# Altium PCB alpha_2.1.PcbDoc (part 2 of 2)
Units mil, origin at the board's own origin, x right, y up, seen from the top; angles counter-clockwise.
Board outline 3200 x 2100 mil, 6 copper layers (Component Side, Ground Plane (GND), Inner Layer 1, Inner Layer 2, Power Plane (VCC), Solder Side), stack 51.068 mil thick; 181 components, 149 nets, 637 pads, 303 vias.
Unrouted connection lines stored in the file: 8.
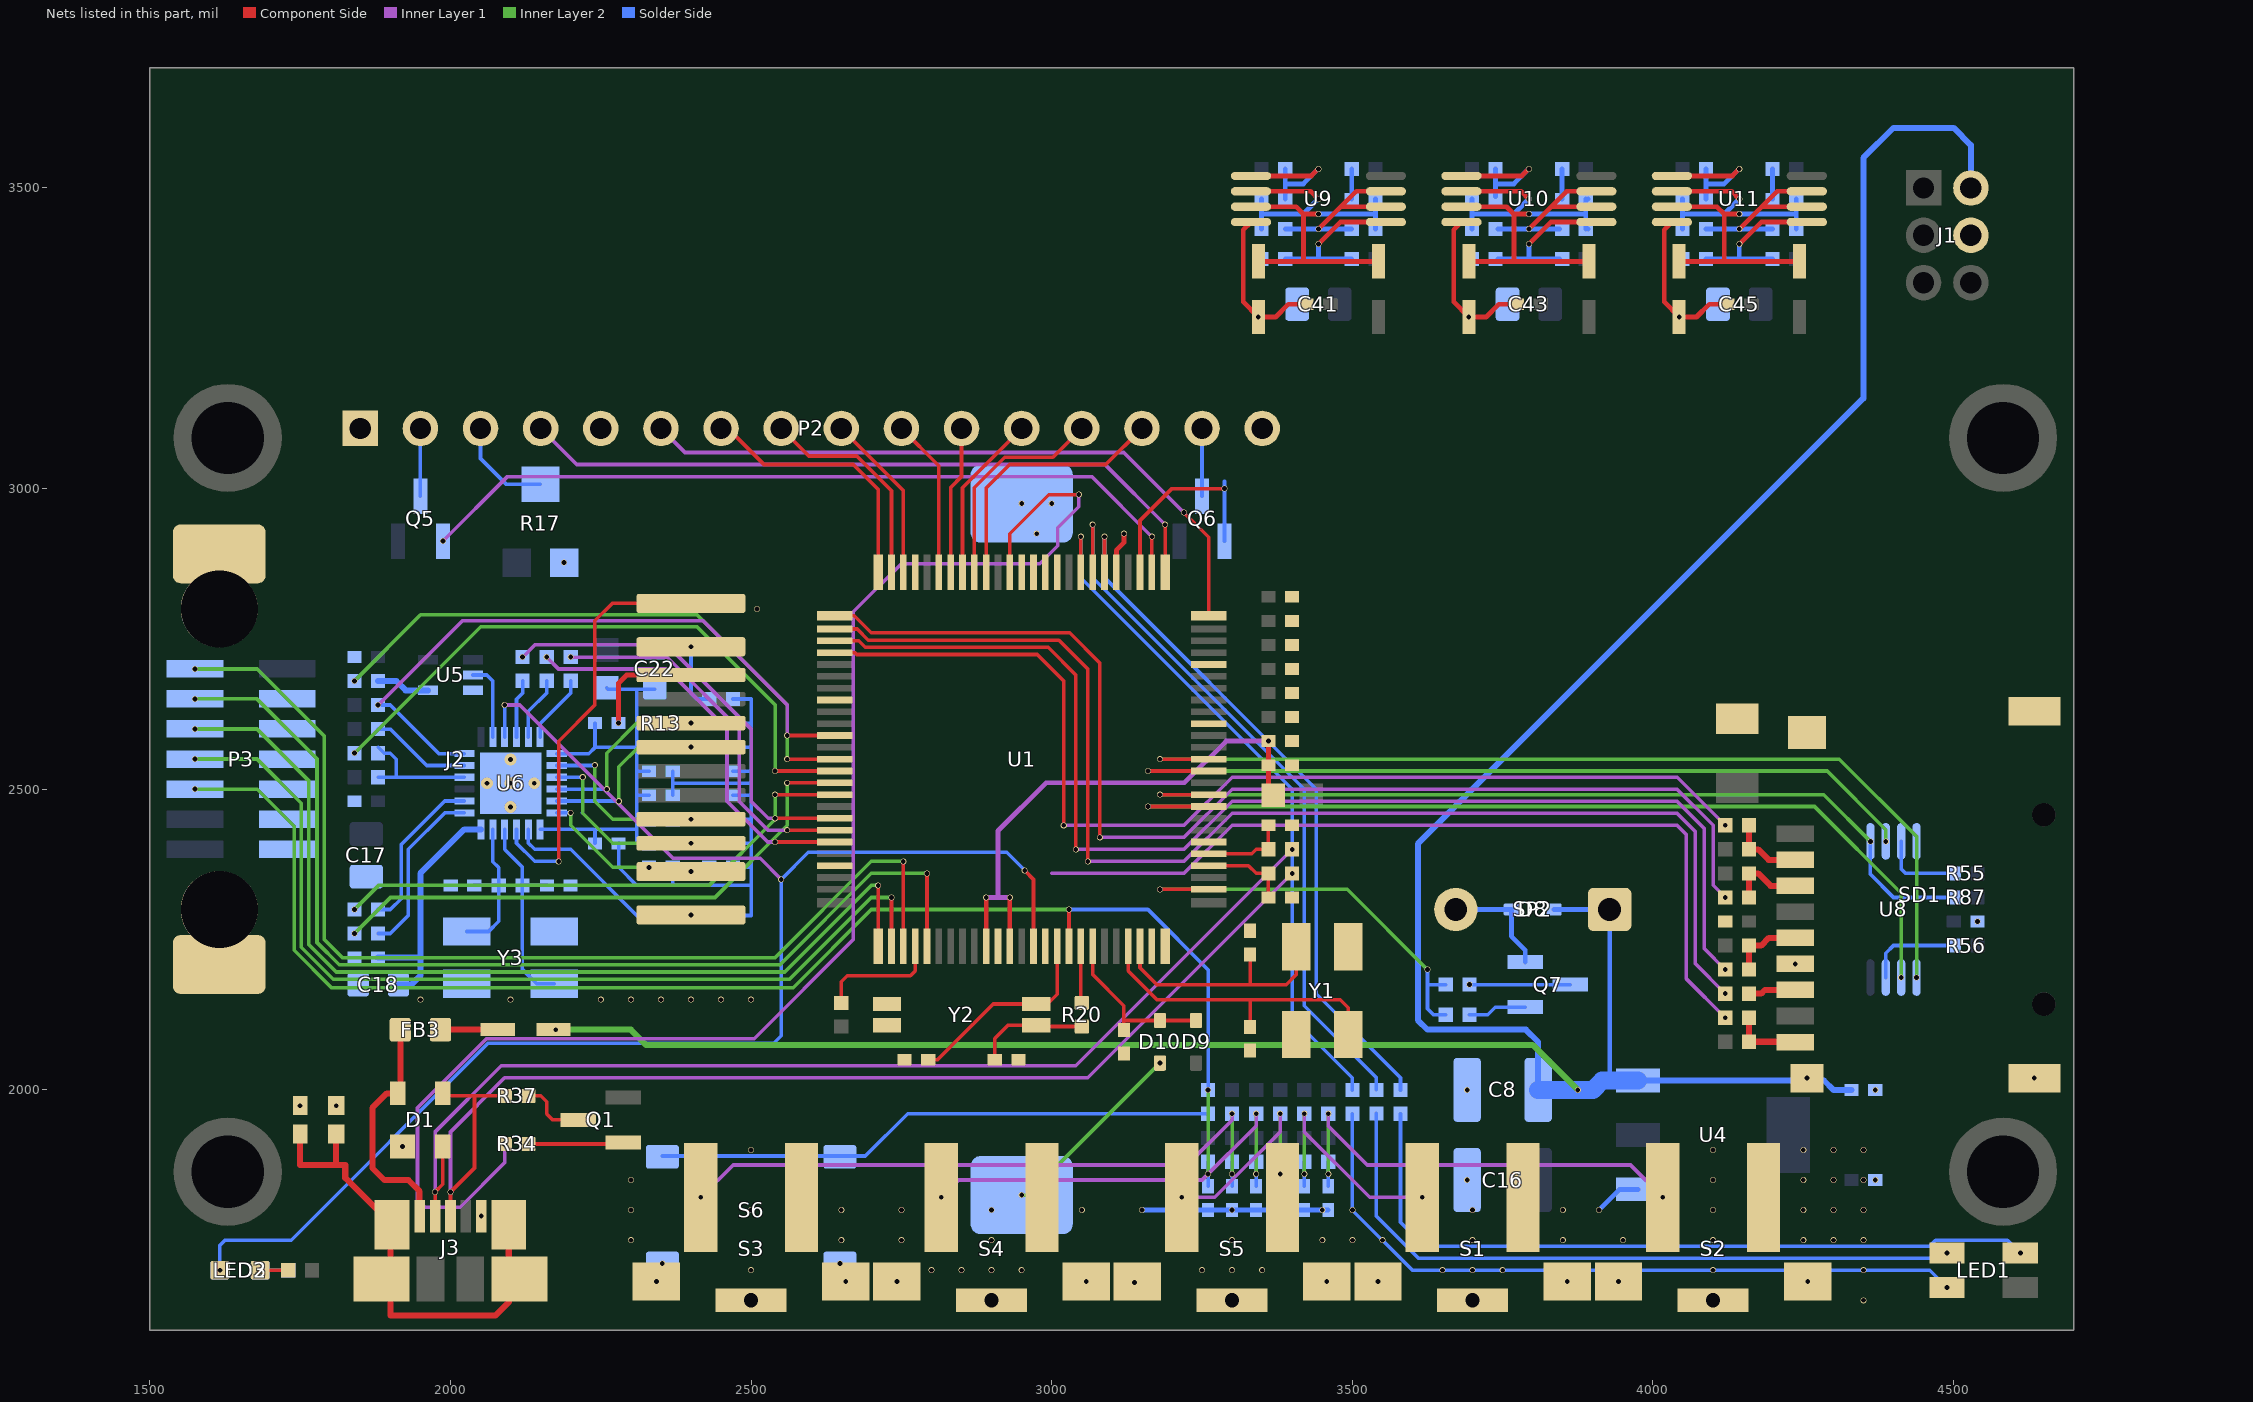
[diagram p6: the nets of this part, all layers, seen from the top]

## Via types
v1: diameter 10, hole 8, Component Side to Inner Layer 1, 119 vias
v2: diameter 10, hole 8, Component Side to Solder Side, 117 vias
v3: diameter 10, hole 8, Inner Layer 2 to Solder Side, 62 vias
v4: diameter 19.68, hole 7.87, Component Side to Solder Side, 5 vias

## Nets (pads, with @x,y where several pads share a name; then routed paths per layer and width w, separated by ;. In a path a pad name is that pad's centre, name@x,y a point inside that pad or via, vN(x,y) a via of type N, cw(c..) or ccw(c..) an arc to the next point about the centre after c; other vN are vias at no path point) (continued)
ENET-MDIO: R6.2 U1.86 U6.12 | length 1102.9
  Component Side w6: v1(2560,2589.37) U1.86@2638.98,2589.37
  Inner Layer 1 w6: v2(1879.69,2640) 1880,2640 2020,2780 2420,2780 2560,2640 v1(2560,2589.37)
  Solder Side w6: v2(1879.69,2640) 1900,2640 1980.79,2559.21 U6.12@2023.23,2559.21
ENET-REF_CLK: R5.1 U1.88 | length 996.4
  Component Side w6: v2(2560,2550) U1.88@2638.98,2550
  Inner Layer 2 w6: v3(1840.32,2680) 1950.32,2790 2410,2790 2560,2640 v2(2560,2550)
ENET-RX_ER: R4.1 U1.89 | length 1049.2
  Component Side w6: v2(2540,2530.32) U1.89@2638.98,2530.32
  Inner Layer 2 w6: v3(1840.32,2560) 2050.32,2770 2410,2770 2540,2640 v2(2540,2530.32)
ENET-RXD0: R1.1 U1.91 | length 901.7
  Component Side w6: v2(2540,2490.94) U1.91@2638.98,2490.94
  Inner Layer 2 w6: v3(1840.32,2300) 1880.32,2340 2430,2340 2540,2450 v2(2540,2490.94)
ENET-RXD1: R2.1 U1.90 | length 943.8
  Component Side w6: v2(2560,2510.63) U1.90@2638.98,2510.63
  Inner Layer 2 w6: v3(1840.32,2260) 1900.32,2320 2440,2320 2560,2440 v2(2560,2510.63)
ENET-TX_EN: R92.1 U1.93 | length 717.2
  Component Side w6: v1(2540,2451.57) U1.93@2638.98,2451.57
  Inner Layer 1 w6: v2(2120,2719.68) 2140.32,2740 2360,2740 2500,2600 2500,2480 2528.43,2451.57 v1(2540,2451.57)
ENET-TXD0: R90.1 U1.95 | length 676.6
  Component Side w6: v1(2540,2412.2) U1.95@2638.98,2412.2
  Inner Layer 1 w6: v2(2160,2719.68) 2179.68,2700 2360,2700 2460,2600 2460,2480 2527.8,2412.2 v1(2540,2412.2)
ENET-TXD1: R91.1 U1.94 | length 628.5
  Component Side w6: v1(2560,2431.89) U1.94@2638.98,2431.89
  Inner Layer 1 w6: v2(2200,2719.68) 2360.32,2719.68 2480,2600 2480,2480 2528.11,2431.89 v1(2560,2431.89)
GND: BT1.2 C1.2 C2.2 C3.1 C4.2 C5.1 C6.1 C7.1 C8.2 C9.1 C10.2 C11.2 C12.2 C13.1 C14.2 C15.1 C16.2 C17.2 C18.2 C19.2 C20.2 C21.1 C22.2 C23.1 C24.1 C25.1 C26.1 C27.1 C28.2 C29.2 C30.2 C31.2 C32.2 C33.2 C34.2 C35.2 C36.2 C37.2 C38.2 C41.2 C43.2 C45.2 C64.2 C65.2 C66.2 C67.1 C68.1 C69.1 C70.1 C71.1 C72.1 C73.2 C74.2 C75.2 D1.1 D3.1 D5.1 D7.1 J1.5 J2.10 J2.MH1 J2.MH2 J3.5 LED2.K P2.1 P2.5 P2.16 P3.3 P3.5 P3.7 P3.9 P3.11 P3.13 Q7.3 R9.1 R14.2 R15.1 R16.1 R17.1 R30.1 R65.1 R72.1 R79.1 R85.1 S1.2 S1.3 S2.2 S2.3 S3.2 S3.3 S4.2 S4.3 S5.2 S5.3 S6.1 SD1.6 SD1.10 SD1.11 SD1.12 SD1.13 U1.11 U1.15 U1.31 U1.41 U1.55 U1.72 U1.83 U1.97 U4.1 U5.3 U6.25 U8.4 U9.4 U10.4 U11.4 Y1.2 Y1.4 Y2.2 Y2.3 Y3.2 Y3.4 | length 2712.1
  Component Side w8: v2(2279.69,2610) 2279.69,2676.69 2293,2690 J2.10@2400,2690 ; U1.55@3107.48,2861.02 3107.48,2897.48 3120,2910 v1(3120,2925) ; U9.4@3331.4,3443.29 3318.61,3430.49 3318.61,3310.41 v2(3343.61,3285.41) 3372.35,3285.41 3393.61,3306.67 C36.2@3423.92,3306.67 ; U10.4@3681.4,3443.29 3668.61,3430.49 3668.61,3310.41 v2(3693.61,3285.41) 3722.35,3285.41 3743.61,3306.67 C37.2@3773.92,3306.67 ; U11.4@4031.4,3443.29 4018.61,3430.49 4018.61,3310.41 v2(4043.61,3285.41) 4072.35,3285.41 4093.61,3306.67 C38.2@4123.92,3306.67
  Solder Side w6: C4.2@2279.69,2410 2279.69,2370.31 2310,2340 2500,2340 ; 2369.68,2340 R9.1@2369.68,2370 ; C21.1@2369.68,2490 C27.1@2369.68,2530 ; 2370,2510 2500,2510 ; R14.2@2469.69,2290 2500,2290 2500,2340 ; R16.1@2469.68,2370 2500,2370 ; C23.1@2469.68,2410 2500,2410 ; C24.1@2469.68,2450 2500,2450 ; C28.2@2469.69,2490 2500,2490 ; C29.2@2469.69,2530 2500,2530 ; C25.1@2469.68,2570 2500,2570 ; C26.1@2469.68,2610 2500,2610 ; R15.1@2469.68,2650 2500,2650 2500,2510 ; v1(3694.68,2175) Q7.3@3862.4,2175 ; 2500,2340 2500,2370 ; 2500,2370 2500,2510
  Solder Side w8: v1(3150,1800) 3150.31,1800.31 C14.2@3260,1800.31 C33.2@3300,1800.31 C31.2@3340,1800.31 C30.2@3380,1800.31 C35.2@3420,1800.31 C34.2@3460,1800.31 ; v2(3910,1800) 3944.45,1834.45 U4.1@3975,1834.45
  other v1: 4350,1650 3137.52,1679.68 2342.52,1681.5 2657.48,1681.5 2742.52,1681.5 3057.48,1681.5 3457.48,1681.5 3542.52,1681.5 4257.48,1681.5 1616.54,1700 2500,1700 2800,1700 2850,1700 2900,1700 2950,1700 3250,1700 3300,1700 3350,1700 3650,1700 3700,1700 3750,1700 4100,1700 4350,1700 2300,1750 2650,1750 2750,1750 2900,1750 3300,1750 3450,1750 3500,1750 3550,1750 3700,1750 3850,1750 3950,1750 4100,1750 4250,1750 4300,1750 4350,1750 2051.13,1790 2300,1800 2500,1800 2650,1800 2750,1800 2900,1800 3050,1800 3300,1800 3450,1800 3500,1800 3700,1800 3850,1800 4100,1800 4250,1800 4300,1800 4350,1800 2300,1850 4100,1850 4250,1850 4300,1850 4350,1850 4369.69,1850 2500,1900 4100,1900 4250,1900 4300,1900 4350,1900 1920.47,1905.71 1750,1973.62 1810,1973.62 3690.94,2000 4369.69,2000 4256.3,2019.49 4634.25,2019.49 1950,2150 2100,2150 4236.61,2209.45 4539.69,2280
  other v2: 3857.48,1681.5 3942.52,1681.5 2352.36,1711.42 2647.64,1711.42 3690.94,1850 2250,2150 2300,2150 2350,2150 2400,2150 2450,2150 2500,2150 2510,2800 2189,2877 2975,2925 2950,2975 3000,2975
  other v4: 2100,2470.63 2060.63,2510 2100,2510 2139.37,2510 2100,2549.37
I2C_SCL: U1.24
I2C_SDA: U1.25
JTAG_RESET: C14.1 P3.10 R22.1 R23.1 U1.17 | length 2479.5
  Component Side w6: U1.17@3028.74,2238.98 v2(3028.74,2300)
  Inner Layer 2 w6: v3@1575,2500 1678.54,2500 1740,2438.54 1740,2232.12 1802.12,2170 2570,2170 2700,2300 v2(3028.74,2300) ; v3(3260,1860) v3(3260,1999.68)
  Solder Side w6: v2(3028.74,2300) 3160,2300 3260,2200 v3(3260,1999.68) ; C14.1@3260,1839.68 v3(3260,1860) R23.1@3260,1880.32
  other v3: 1575,2500.2
JTAG_TCLK_SWCLK: P3.4 U1.5 | length 1763.6
  Component Side w6: U1.5@2792.52,2238.98 v2(2792.52,2360)
  Inner Layer 2 w6: v3(1575,2650.2) 1678.35,2650.2 1778,2550.54 1778,2245.03 1815.03,2208 2548,2208 2700,2360 v2(2792.52,2360)
JTAG_TDI: P3.8 U1.2 | length 1587.8
  Component Side w6: U1.2@2733.46,2238.98 v2(2733.46,2320)
  Inner Layer 2 w6: v3(1575,2550.2) 1678.35,2550.2 1752,2476.54 1752,2237.09 1805.09,2184 2564,2184 2700,2320 v2(2733.46,2320)
JTAG_TDO_SWO: P3.6 U1.1 | length 1624.1
  Component Side w6: U1.1@2711.42,2238.98 v2(2711.42,2340)
  Inner Layer 2 w6: v3(1575,2600.2) 1678.35,2600.2 1764,2514.54 1764,2242.06 1810.06,2196 2556,2196 2700,2340 v2(2711.42,2340)
JTAG_TMS_SWDIO: P3.2 U1.3 | length 1782.6
  Component Side w6: U1.3@2753.15,2238.98 v2(2753.15,2380)
  Inner Layer 2 w6: v3@1575,2700 1678.54,2700 1790,2588.54 1790,2250 1820,2220 2540,2220 2700,2380 v2(2753.15,2380)
  other v3: 1575,2700.2
JTAG_TRST: R100.2 U1.4 | length 206.7
  Component Side w6: R100.2@2650,2144.69 2650,2180 2660,2190 2765,2190 2772.83,2197.83 U1.4@2772.83,2238.98
LCD_BL: Q6.1 U1.53 | length 348.2
  Component Side w6: U1.53@3146.85,2861.02 3146.85,2946.85 3200,3000 v2(3287.4,3000)
  Solder Side w6: Q6.1@3287.4,2912.6 v2(3287.4,3000) 3287.4,3012.4
LCD_D0: P2.7 U1.75 | length 441
  Component Side w6: P2.7@2450,3100 2461.47,3100 2521.47,3040 2670,3040 2711.42,2998.58 U1.75@2711.42,2861.02
LCD_D1: P2.8 U1.74 | length 361.8
  Component Side w6: P2.8@2550,3100 2595.87,3054.13 2675.87,3054.13 2733.46,2996.54 U1.74@2733.46,2861.02
LCD_D2: P2.9 U1.73 | length 281.7
  Component Side w6: P2.9@2650,3100 2753.15,2996.85 U1.73@2753.15,2861.02
LCD_D3: P2.10 U1.70 | length 264.7
  Component Side w6: P2.10@2750,3100 2812.2,3037.8 U1.70@2812.2,2861.02
LCD_D4: P2.11 U1.69 | length 246.5
  Component Side w6: U1.69@2831.89,2861.02 2831.89,3001.89 2850,3020 P2.11@2850,3100
LCD_D5: P2.12 U1.68 | length 279.7
  Component Side w6: U1.68@2851.57,2861.02 2851.57,3001.57 P2.12@2950,3100
LCD_D6: P2.13 U1.67 | length 359.9
  Component Side w6: U1.67@2871.26,2861.02 2871.26,3001.26 2922,3052 3002,3052 P2.13@3050,3100
LCD_D7: P2.14 U1.66 | length 440
  Component Side w6: U1.66@2890.94,2861.02 2890.94,3000.94 2930,3040 3090,3040 P2.14@3150,3100
LCD_EN: P2.6 U1.50 | length 1116.4
  Component Side w6: v1(3220,2960) 3261.02,2918.98 U1.50@3261.02,2788.58
  Inner Layer 1 w6: P2.6@2350,3100 2390,3060 3120,3060 v1(3220,2960)
LCD_PW: Q5.1 U1.52 | length 1324
  Component Side w6: U1.52@3166.54,2861.02 v1(3166.54,2920)
  Inner Layer 1 w6: v2(1987.4,2912.6) 2094.8,3020 3066.54,3020 v1(3166.54,2920)
LCD_RS: P2.4 U1.51 | length 1183.8
  Component Side w6: U1.51@3188.58,2861.02 v1(3188.58,2940)
  Inner Layer 1 w6: P2.4@2150,3100 2210,3040 3088.58,3040 v1(3188.58,2940)
LED_B: R43.2 U1.57 | length 1214.4
  Component Side w6: U1.57@3068.11,2861.02 v2(3068.11,2940)
  Solder Side w6: v2(3068.11,2940) 3068.11,2851.89 3420,2500 3420,2140 3540,2020 R43.2@3540,2000
LED_G: R41.2 U1.58 | length 1166.3
  Component Side w6: U1.58@3048.43,2861.02 v2(3048.43,2920)
  Solder Side w6: v2(3048.43,2920) 3048.43,2851.57 3400,2500 3400,2120 3500,2020 R41.2@3500,1999.69
LED_R: R39.1 U1.56 | length 1183.2
  Component Side w6: U1.56@3087.8,2861.02 v2(3087.8,2920)
  Solder Side w6: v2(3087.8,2920) 3087.8,2852.2 3440,2500 3440,2160 3580,2020 R39.1@3580,1999.68
NetC2_1: C2.1 C4.1 C21.2 C22.1 C27.2 FB2.1 R10.1 R11.1 R12.1 R13.1 U6.1 U6.19 | length 821.1
  Solder Side w6: U6.1@2149.21,2433.23 2310,2433.23 ; U6.19@2176.77,2559.21 2230,2559.21 2240.32,2569.53 ; C4.1@2240.32,2410 2240.32,2432.91 ; C2.1@2240.32,2610 2240.32,2569.53 ; FB2.1@2260,2668.5 2261.97,2666.54 2310,2666.54 ; 2310,2490 C21.2@2330.31,2490 ; 2310,2530 C27.2@2330.31,2530 ; R10.1@2330.32,2410 2310,2410 2310,2433.23 ; R11.1@2330.32,2450 2310,2450 ; R12.1@2330.32,2570 2310,2570 ; R13.1@2330.32,2610 2310,2610 ; C22.1@2340,2666.54 2310,2666.54 ; 2240.32,2569.53 2240.79,2570 2310,2570 ; 2310,2433.23 2310,2450 ; 2310,2450 2310,2570 ; 2310,2570 2310,2610 ; 2310,2610 2310,2666.54
NetC3_2: C3.2 R8.1 U6.5 Y3.1 | length 257.8
  Solder Side w6: Y3.1@2027.17,2263.31 2063.31,2263.31 2080.31,2280.31 R8.1@2080.32,2340 ; C3.2@2039.69,2340 R8.1@2080.32,2340 ; U6.5@2070.47,2433.23 2070.47,2379.53 2080.32,2369.68 R8.1@2080.32,2340
NetC5_2: C5.2 R8.2 U6.4 Y3.3 | length 348.7
  Solder Side w6: U6.4@2090.16,2433.23 2090.16,2399.84 2119.69,2370.31 R8.2@2119.69,2340 ; C5.2@2160.31,2340 R8.2@2119.69,2340 ; Y3.3@2172.83,2176.69 2143.31,2176.69 2119.69,2200.31 R8.2@2119.69,2340
NetC12_1: C12.1 R20.1 Y2.4 | length 187.1
  Component Side w6: C12.1@2905.32,2050 2905.32,2085.32 2927.28,2107.28 Y2.4@2974.02,2107.28 ; Y2.4@2975.98,2105.32 R20.1@3050,2105.32
NetC18_1: C18.1 C20.1 U6.6 | length 414.2
  Solder Side w10: C20.1@1879.68,2220 1950,2220 ; C18.1@1913.46,2175 1935,2175 1950,2190 1950,2220 ; U6.6@2050.79,2433.23 2023.23,2433.23 1950,2360 1950,2220
NetC23_2: C23.2 J2.3 R10.2 U6.21 | length 364.4
  Inner Layer 2 w6: v3(2220,2520) 2220,2460 2270,2410 v2(2400,2410)
  Solder Side w6: U6.21@2176.77,2519.84 v3@2219.84,2519.84
  Solder Side w10: R10.2@2369.69,2410 C23.2@2430.31,2410
NetC24_2: C24.2 J2.4 R11.2 U6.20 | length 355.8
  Inner Layer 2 w6: v3(2240,2540) 2240,2480 2270,2450 v2(2400,2450)
  Solder Side w6: U6.20@2176.77,2539.53 v3@2239.53,2539.53
  Solder Side w10: R11.2@2369.69,2450 C24.2@2430.31,2450
NetC25_2: C25.2 J2.7 R12.2 U6.23 | length 354.3
  Inner Layer 2 w6: v3(2280,2480) 2280,2537.37 2312.63,2570 v2(2400,2570)
  Solder Side w6: U6.23@2176.77,2480.47 v3@2279.53,2480.47
  Solder Side w10: R12.2@2369.69,2570 C25.2@2430.31,2570
NetC26_2: C26.2 J2.8 R13.2 U6.22 | length 364.1
  Inner Layer 2 w6: v3(2260,2500) 2260,2560 2310,2610 v2(2400,2610)
  Solder Side w6: U6.22@2176.77,2500.16 v3@2259.84,2500.16
  Solder Side w10: R13.2@2370,2610 C26.2@2430.31,2610
NetC30_1: C30.1 R29.1 R31.2 S5.1 | length 380
  Inner Layer 1 w6: v1(3216.34,1821.26) 3271.26,1821.26 3380,1930 v2(3380,1960.32)
  Inner Layer 2 w6: v3(3380,1860) v2(3380,1960.32)
  Solder Side w6: C30.1@3380,1839.68 v3(3380,1860) R31.2@3380,1880.31
NetC31_1: C31.1 R28.2 R32.2 S4.1 | length 734.1
  Inner Layer 1 w6: v1(2816.34,1821.26) 2845.08,1850 3250,1850 3340,1940 v2(3340,1960.32)
  Inner Layer 2 w6: v3(3340,1860) v2(3340,1960.32)
  Solder Side w6: C31.1@3340,1839.68 v3(3340,1860) R32.2@3340,1880.31
NetC32_1: C32.1 J3.MH1 J3.MH2 J3.MH3 J3.MH4 R30.2 | length 796.2
  Component Side w10: C32.1@1750,1926.38 1750,1875 1810,1875 ; R30.2@1810,1926.38 1810,1875 ; J3.MH2@2096.92,1775.82 2096.92,1646.92 2075,1625 1900,1625 1900,1772.72 J3.MH3@1903.02,1775.74 1825,1853.77 1825,1875 1810,1875
NetC33_1: C33.1 R27.2 R33.2 S3.1 | length 1088.2
  Inner Layer 1 w6: v1(2416.34,1821.26) 2470.08,1875 3225,1875 3300,1950 v2(3300,1960.32)
  Inner Layer 2 w6: v3(3300,1860) v2(3300,1960.32)
  Solder Side w6: C33.1@3300,1839.68 v3(3300,1860) R33.2@3300,1880.31
NetC34_1: C34.1 R26.2 R35.2 S2.1 | length 766.8
  Inner Layer 1 w6: v2(3460,1960.32) 3460,1940 3525,1875 3962.6,1875 v1(4016.34,1821.26)
  Inner Layer 2 w6: v3(3460,1860) v2(3460,1960.32)
  Solder Side w6: C34.1@3460,1839.68 v3(3460,1860) R35.2@3460,1880.31
NetC35_1: C35.1 R25.1 R36.2 S1.1 | length 412.6
  Inner Layer 1 w6: v2(3420,1960.32) 3420,1930 3528.74,1821.26 v1(3616.34,1821.26)
  Inner Layer 2 w6: v3(3420,1860) v2(3420,1960.32)
  Solder Side w6: C35.1@3420,1839.68 v3(3420,1860) R36.2@3420,1880.31
NetC40_1: C40.1 R44.2 | length 50
  Solder Side w8: C40.1@3498.92,3481.67 R44.2@3498.92,3531.67
NetC40_2: C40.2 D2.1 D3.2 R61.2 U9.3 | length 540.7
  Component Side w8: U9.3@3331.4,3468.88 3406.4,3468.88 3418.61,3456.67 ; D3.2@3343.61,3377.93 3418.61,3377.93 ; v2(3443.61,3456.67) 3418.61,3456.67 ; D2.1@3543.61,3377.93 3418.61,3377.93 ; 3418.61,3377.93 3418.61,3456.67
  Solder Side w8: v2(3443.61,3456.67) 3538.29,3456.67 ; R61.2@3538.29,3431.67 3538.29,3456.67 ; C40.2@3538.29,3481.67 3538.29,3456.67
NetC42_1: C42.1 R66.2 | length 50
  Solder Side w8: C42.1@3848.92,3481.67 R66.2@3848.92,3531.67
NetC42_2: C42.2 D4.1 D5.2 R68.2 U10.3 | length 540.7
  Component Side w8: U10.3@3681.4,3468.88 3756.4,3468.88 3768.61,3456.67 ; D5.2@3693.61,3377.93 3768.61,3377.93 ; v2(3793.61,3456.67) 3768.61,3456.67 ; D4.1@3893.61,3377.93 3768.61,3377.93 ; 3768.61,3377.93 3768.61,3456.67
  Solder Side w8: v2(3793.61,3456.67) 3888.29,3456.67 ; R68.2@3888.29,3431.67 3888.29,3456.67 ; C42.2@3888.29,3481.67 3888.29,3456.67
NetC44_1: C44.1 R73.2 | length 50
  Solder Side w8: C44.1@4198.92,3481.67 R73.2@4198.92,3531.67
NetC44_2: C44.2 D6.1 D7.2 R75.2 U11.3 | length 540.7
  Component Side w8: U11.3@4031.4,3468.88 4106.4,3468.88 4118.61,3456.67 ; D7.2@4043.61,3377.93 4118.61,3377.93 ; v2(4143.61,3456.67) 4118.61,3456.67 ; D6.1@4243.61,3377.93 4118.61,3377.93 ; 4118.61,3377.93 4118.61,3456.67
  Solder Side w8: v2(4143.61,3456.67) 4238.29,3456.67 ; R75.2@4238.29,3431.67 4238.29,3456.67 ; C44.2@4238.29,3481.67 4238.29,3456.67
NetC73_1: C73.1 C74.1 FB1.1 U1.10 U1.12 | length 917
  Component Side w8: U1.10@2890.94,2238.98 v1(2890.94,2320) ; U1.12@2930.32,2238.98 v1(2930.32,2320) ; v1(3360.32,2580) C74.1@3360.32,2540 3360.32,2498.19 FB1.1@3368.5,2490
  Inner Layer 1 w8: v1(2890.94,2320) 2910.63,2320 ; v1(2930.32,2320) 2910.63,2320 ; v1(3360.32,2580) 3290,2580 3220.63,2510.63 2990.63,2510.63 2910.63,2430.63 2910.63,2320
NetC75_1: C75.1 D9.K D10.K U1.19 | length 280.8
  Component Side w6: U1.19@3068.11,2238.98 3068.11,2191.89 3120,2140 3120,2115.43 ; C75.1@3120,2099.68 3120,2115.43 ; D9.K@3240,2115.43 D10.K@3180,2115.43 3120,2115.43
NetD1_4: D1.4 FB3.2 J3.1 | length 396.1
  Component Side w10: FB3.2@1916.54,2100 1916.54,1998.23 D1.4@1912.6,1994.29 1894.29,1994.29 1870,1970 1870,1870 1890,1850 1930,1850 1948.81,1831.19 J3.1@1948.81,1790
NetD8_A: D8.A Q7.2 SP2.2 | length 189.7
  Solder Side w8: SP2.2@3672.05,2300 D8.A@3764.57,2300 3764.57,2255.43 3787.6,2232.4 Q7.2@3787.6,2212.4
NetD11_1: D11.1 FB3.1 | length 95.3
  Component Side w10: FB3.1@1983.46,2100 D11.1@2078.74,2100
NetJ2_1: J2.1 R14.1 U6.2 | length 373.4
  Solder Side w6: U6.2@2129.53,2433.23 2129.53,2410.47 2140,2400 2200,2400 2310,2290 R14.1@2430.32,2290
  other v2: 2400,2291
NetJ2_2: J2.2 R16.2 | length 33.2
  Solder Side w6: v2(2400,2363) 2407,2370 R16.2@2430.31,2370
NetJ2_11: J2.11 R15.2 | length 111.5
  Solder Side w6: v2(2400,2737) 2400,2660 2410,2650 R15.2@2430.31,2650
NetJ2_12: J2.12 U6.3 | length 702.6
  Component Side w6: v2(2180,2380) 2180,2580 2240,2640 2240,2780 2269,2809 J2.12@2400,2809
  Solder Side w6: U6.3@2109.84,2433.23 2109.84,2410.16 2140,2380 v2(2180,2380)
NetLED1_B: LED1.B R43.1 | length 1152.1
  Solder Side w6: R43.1@3540,1960.63 3540,1790 3610,1720 4480.5,1720 v2(4489,1728.5)
NetLED1_G: LED1.G R41.1 | length 1202.5
  Solder Side w6: R41.1@3500,1960.32 3500,1800 3600,1700 4460.5,1700 v2(4489,1671.5)
NetLED1_R: LED1.R R39.2 | length 1240.9
  Solder Side w6: R39.2@3580,1960.31 3580,1780 3620,1740 4460,1740 4470,1750 4589.5,1750 v2(4611,1728.5)
NetLED2_A: LED2.A R21.1 | length 46.9
  Component Side w6: LED2.A@1683.46,1700 R21.1@1730.32,1700
NetLED3_A: LED3.A R24.1 | length 46.9
  Solder Side w6: LED3.A@1683.46,1700 R24.1@1730.32,1700
NetP2_2: P2.2 Q5.3 | length 112.6
  Solder Side w6: Q5.3@1950,2987.4 P2.2@1950,3100
NetP2_3: P2.3 R17.2 | length 167.5
  Solder Side w6: P2.3@2050,3100 2050,3050 2093.08,3006.92 R17.2@2149.63,3006.92
NetP2_15: P2.15 Q6.3 | length 112.6
  Solder Side w6: Q6.3@3250,2987.4 P2.15@3250,3100
NetQ1_1: Q1.1 R34.1 | length 158.8
  Component Side w6: R34.1@2129.68,1910 2284.8,1910 Q1.1@2287.4,1912.6
NetQ1_3: Q1.3 R37.1 | length 111.2
  Component Side w6: R37.1@2129.68,1990 2150,1990 2160,1980 2160,1960 2170,1950 Q1.3@2212.6,1950
NetQ7_1: Q7.1 R84.2 | length 98.1
  Solder Side w6: R84.2@3694.69,2125 3725,2125 3737.6,2137.6 Q7.1@3787.6,2137.6
NetR1_2: R1.2 U6.8 | length 271
  Solder Side w6: R1.2@1879.69,2300 1900,2300 1918,2318 1918,2408 1990.47,2480.47 U6.8@2023.23,2480.47
NetR2_2: R2.2 U6.7 | length 291.1
  Solder Side w6: R2.2@1879.69,2260 1900,2260 1930,2290 1930,2400 1990.79,2460.79 U6.7@2023.23,2460.79
NetR3_2: R3.2 U6.11 | length 168.6
  Solder Side w6: R3.2@1879.69,2600 1900,2600 1960.47,2539.53 U6.11@2023.23,2539.53
NetR4_2: R4.2 R7.2 U6.10 | length 211.9
  Solder Side w6: R7.2@1879.69,2520 2023.07,2520 U6.10@2023.23,2519.84 ; R4.2@1880,2570 1890,2560 1900,2560 1910,2550 1910,2520
NetR5_2: R5.2 U5.4 | length 89.4
  Solder Side w10: R5.2@1879.69,2680 1910,2680 1925.59,2664.41 U5.4@1962.6,2664.41
NetR9_2: R9.2 U6.24 | length 204.4
  Inner Layer 2 w6: v3(2200,2460.79) 2200,2440 2270,2370 v3(2330.31,2370)
  Solder Side w6: U6.24@2176.77,2460.79 v3(2200,2460.79) ; 2219.21,2460.79 2220,2460
NetR22_2: R22.2 S6.2 | length 936.8
  Solder Side w6: S6.2@2352.36,1890 2690,1890 2760.31,1960.31 R22.2@3260,1960.31
NetR50_1: R50.1 R89.1 SD1.2 | length 117.8
  Component Side w10: R89.1@4159.69,2440 R50.1@4159.69,2400 4175,2400 4192.32,2382.68 SD1.2@4230.31,2382.68
NetR51_1: R51.1 R59.1 SD1.3 | length 119.2
  Component Side w10: R59.1@4159.69,2320 R51.1@4159.69,2360 4175,2360 4195.63,2339.37 SD1.3@4230.31,2339.37
NetR52_1: R52.1 R58.1 SD1.5 | length 115.9
  Component Side w10: R58.1@4159.69,2200 R52.1@4159.69,2240 4180,2240 4192.76,2252.76 SD1.5@4230.31,2252.76
NetR53_1: R53.1 R57.1 SD1.9 | length 110.8
  Component Side w10: R57.1@4159.69,2120 R53.1@4159.69,2080 4229.84,2080 SD1.9@4230.31,2079.53
NetR55_2: R55.2 U8.3 | length 136.5
  Solder Side w6: U8.3@4412.8,2413.19 4412.8,2367.2 4420,2360 R55.2@4500.31,2360
NetR56_2: R56.2 U8.7 | length 158.8
  Solder Side w6: U8.7@4387.2,2186.81 4387.2,2227.2 4400,2240 R56.2@4500.31,2240
NetR60_1: R60.1 R64.2 U9.1 | length 232.7
  Component Side w8: U9.1@3331.4,3520.06 3431.99,3520.06 v2(3443.61,3531.67)
  Solder Side w8: R64.2@3388.29,3481.67 3388.29,3506.67 ; R60.1@3388.29,3531.67 3388.29,3506.67 ; v2(3443.61,3531.67) 3418.61,3506.67 3388.29,3506.67
NetR61_1: R61.1 R63.1 U9.6 U9.7 | length 323.8
  Component Side w8: v2(3443.61,3431.67) 3480.81,3468.88 ; U9.6@3555.81,3468.88 3480.81,3468.88 ; U9.7@3555.81,3494.47 3506.4,3494.47 3480.81,3468.88
  Solder Side w8: R63.1@3388.29,3431.67 R61.1@3498.92,3431.67
NetR62_1: R62.1 R65.2 U9.5 | length 263
  Component Side w8: v2(3443.61,3406.67) 3480.22,3443.29 U9.5@3555.81,3443.29
  Solder Side w8: R65.2@3388.29,3381.67 3443.61,3381.67 ; v2(3443.61,3406.67) 3443.61,3381.67 ; R62.1@3498.92,3381.67 3443.61,3381.67
NetR63_2: R63.2 R64.1 U9.2 | length 272.5
  Component Side w8: U9.2@3331.4,3494.47 3430.81,3494.47 v2(3443.61,3481.67)
  Solder Side w8: R63.2@3348.92,3431.67 3348.92,3456.67 ; R64.1@3348.92,3481.67 3348.92,3456.67 ; v2(3443.61,3481.67) 3418.61,3456.67 3348.92,3456.67
NetR67_1: R67.1 R71.2 U10.1 | length 228.7
  Component Side w8: U10.1@3681.4,3520.06 3781.99,3520.06 v2(3793.61,3531.67)
  Solder Side w8: R71.2@3738.29,3485.61 3738.29,3506.67 ; R67.1@3738.29,3531.67 3738.29,3506.67 ; v2(3793.61,3531.67) 3768.61,3506.67 3738.29,3506.67
NetR68_1: R68.1 R70.1 U10.6 U10.7 | length 316
  Component Side w8: v2(3793.61,3431.67) 3830.81,3468.88 ; U10.6@3905.81,3468.88 3830.81,3468.88 ; U10.7@3905.81,3494.47 3856.4,3494.47 3830.81,3468.88
  Solder Side w8: R70.1@3742.23,3431.67 R68.1@3844.98,3431.67
NetR69_1: R69.1 R72.2 U10.5 | length 255.1
  Component Side w8: v2(3793.61,3406.67) 3830.22,3443.29 U10.5@3905.81,3443.29
  Solder Side w8: R72.2@3742.23,3381.67 3793.61,3381.67 ; v2(3793.61,3406.67) 3793.61,3381.67 ; R69.1@3844.98,3381.67 3793.61,3381.67
NetR70_2: R70.2 R71.1 U10.2 | length 272.5
  Component Side w8: U10.2@3681.4,3494.47 3780.81,3494.47 v2(3793.61,3481.67)
  Solder Side w8: R70.2@3698.92,3431.67 3698.92,3456.67 ; R71.1@3698.92,3481.67 3698.92,3456.67 ; v2(3793.61,3481.67) 3768.61,3456.67 3698.92,3456.67
NetR74_1: R74.1 R78.2 U11.1 | length 232.7
  Component Side w8: U11.1@4031.4,3520.06 4131.99,3520.06 v2(4143.61,3531.67)
  Solder Side w8: R78.2@4088.29,3481.67 4088.29,3506.67 ; R74.1@4088.29,3531.67 4088.29,3506.67 ; v2(4143.61,3531.67) 4118.61,3506.67 4088.29,3506.67
NetR75_1: R75.1 R77.1 U11.6 U11.7 | length 323.8
  Component Side w8: v2(4143.61,3431.67) 4180.81,3468.88 ; U11.6@4255.81,3468.88 4180.81,3468.88 ; U11.7@4255.81,3494.47 4206.4,3494.47 4180.81,3468.88
  Solder Side w8: R77.1@4088.29,3431.67 R75.1@4198.92,3431.67
NetR76_1: R76.1 R79.2 U11.5 | length 263
  Component Side w8: v2(4143.61,3406.67) 4180.22,3443.29 U11.5@4255.81,3443.29
  Solder Side w8: R79.2@4088.29,3381.67 4143.61,3381.67 ; v2(4143.61,3406.67) 4143.61,3381.67 ; R76.1@4198.92,3381.67 4143.61,3381.67
NetR77_2: R77.2 R78.1 U11.2 | length 272.5
  Component Side w8: U11.2@4031.4,3494.47 4130.81,3494.47 v2(4143.61,3481.67)
  Solder Side w8: R77.2@4048.92,3431.67 4048.92,3456.67 ; R78.1@4048.92,3481.67 4048.92,3456.67 ; v2(4143.61,3481.67) 4118.61,3456.67 4048.92,3456.67
NetR88_1: R88.1 SD1.7 | length 73.2
  Component Side w10: R88.1@4159.69,2160 4180,2160 4186.14,2166.14 SD1.7@4230.31,2166.14
NetR90_2: R90.2 U6.17 | length 106.2
  Solder Side w6: U6.17@2129.53,2586.77 2129.53,2629.53 2160,2660 R90.2@2160,2680.31
NetR91_2: R91.2 U6.18 | length 114.6
  Solder Side w6: U6.18@2149.21,2586.77 2149.21,2609.21 2200,2660 R91.2@2200,2680.31
NetR92_2: R92.2 U6.16 | length 97.8
  Solder Side w6: U6.16@2109.84,2586.77 2109.84,2649.84 2120,2660 R92.2@2120,2680.31
NetU5_2: U5.2 U6.14 | length 130.4
  Solder Side w6: U5.2@2037.4,2690 2060.47,2690 2070.47,2680 U6.14@2070.47,2586.77
P0_0: U1.46
RSTOUT: LED3.K U1.14 U6.15 | length 2580.7
  Component Side w6: v2(2955,2365) 2955,2364.69 2969.69,2350 U1.14@2969.69,2238.98
  Inner Layer 1 w6: v2(2090.16,2640) 2115,2640 2370,2385 2515,2385 v2(2550,2350)
  Solder Side w6: LED3.K@1616.54,1700 1616.54,1741.54 1625,1750 1735,1750 2062.5,2077.5 2537.5,2077.5 2550,2090 v2(2550,2350) 2595,2395 2925,2395 v2(2955,2365) ; U6.15@2090.16,2586.77 v2(2090.16,2640)
RTCX1: C10.1 U1.16 Y2.1 | length 339.5
  Component Side w6: C10.1@2794.68,2050 2810,2050 2902.72,2142.72 2992.72,2142.72 3009.06,2159.06 U1.16@3009.06,2238.98
RTCX2: R20.2 U1.18 | length 92.7
  Component Side w6: R20.2@3048.43,2146.26 U1.18@3048.43,2238.98
SD_DETECT: R57.2 | length 1426.4
  Inner Layer 1 w6: 3000,2360 3220,2360 3300,2440 4040,2440 4055,2425 4055,2185.31 v1(4120.31,2120)
SP_PWM: R84.1 R85.2 U1.27 | length 711.1
  Component Side w6: v2(3180,2333.46) U1.27@3261.02,2333.46
  Inner Layer 2 w6: v2(3180,2333.46) 3491.54,2333.46 v3(3625,2200)
  Solder Side w6: v3(3625,2200) 3625,2175 ; R84.1@3655.32,2125 3635,2125 3625,2135 3625,2175 ; R85.2@3655.31,2175 3625,2175
SPI_MISO: U1.61
SPI_MOSI: U1.60
SPI_SCK: U1.62
SPI_SSEL: U1.63
SSP0_MISO: U1.37 U8.2 | length 1388.2
  Component Side w6: v2(3160,2530.32) U1.37@3261.02,2530.32
  Inner Layer 2 w6: v2(3160,2530.32) 4289.69,2530.32 4387.2,2432.8 v3(4387.2,2413.19)
SSP0_MOSI: U1.38 U8.5 | length 1627.4
  Component Side w6: v2(3180,2550) U1.38@3261.02,2550
  Inner Layer 2 w6: v2(3180,2550) 4310,2550 4438.39,2421.61 v3(4438.39,2186.81)
SSP0_SCK: U1.34 U8.6 | length 1553.9
  Component Side w6: v2(3160,2471.26) U1.34@3261.02,2471.26
  Inner Layer 2 w6: v2(3160,2471.26) 4268.74,2471.26 4412.8,2327.2 v3(4412.8,2186.81)
SSP0_SSEL: R87.2 U1.35 U8.1 | length 1504.2
  Component Side w6: v2(3180,2490.94) U1.35@3261.02,2490.94
  Inner Layer 2 w6: v2(3180,2490.94) 4283.86,2490.94 v3(4361.61,2413.19)
  Solder Side w6: v3(4361.61,2413.19) 4361.61,2358.39 4400,2320 R87.2@4500.31,2320
SSP1_MISO: R88.2 U1.77 | length 2115
  Component Side w6: U1.77@2638.98,2766.54 2676.49,2766.54 2695.03,2748 3012,2748 3060,2700 v1(3060,2380)
  Inner Layer 1 w6: v1(3060,2380) 3220,2380 3300,2460 4040,2460 4070,2430 4070,2210.31 v1(4120.31,2160)
SSP1_MOSI: R59.2 U1.76 | length 1970
  Component Side w6: U1.76@2638.98,2788.58 2671.42,2788.58 2700,2760 3030,2760 3080,2710 v1(3080,2420)
  Inner Layer 1 w6: v1(3080,2420) 3220,2420 3300,2500 4040,2500 4100,2440 4100,2340.31 v1(4120.31,2320)
SSP1_SCK: R58.2 U1.78 | length 2061
  Component Side w6: U1.78@2638.98,2746.85 2679.21,2746.85 2690.06,2736 2994,2736 3040,2690 v1(3040,2400)
  Inner Layer 1 w6: v1(3040,2400) 3220,2400 3300,2480 4040,2480 4085,2435 4085,2235.31 v1(4120.31,2200)
SSP1_SSEL: R89.2 U1.79 | length 1807.1
  Component Side w6: U1.79@2638.98,2727.17 2672.83,2727.17 2676,2724 2976,2724 3020,2680 v1(3020,2440)
  Inner Layer 1 w6: v1(3020,2440) 3220,2440 3300,2520 4040.31,2520 v1(4120.31,2440)
USB+: D1.3 J3.3 R18.2 R37.2 | length 1999.4
  Component Side w6: D1.3@1987.4,1994.29 1991.69,1990 R37.2@2090.32,1990 ; J3.3@1999.99,1790 v1(1999.99,1830) 2040,1870.01 2040,1990
  Inner Layer 1 w6: v1(1999.99,1830) 1999.99,1930 2089.99,2020 3060,2020 v1(3400,2360)
USB-: D1.2 J3.2 R19.2 | length 1841.4
  Component Side w6: J3.2@1974.4,1790 v1(1974.4,1830) 1987.4,1843 D1.2@1987.4,1905.71
  Inner Layer 1 w6: v1(1974.4,1830) 1974.4,1930 2084.4,2040 3040,2040 v1(3400,2400)
USB-CONNECT: R34.2 U1.64 | length 2440.9
  Component Side w6: U1.64@2930.32,2861.02 2930.32,2925.11 2995.2,2990 v1(3045,2990)
  Inner Layer 1 w6: v1(2090,1910) 2090,1878.58 2016.42,1805 1957.97,1805 1945.11,1817.87 1945.11,1970.11 2060,2085 2505,2085 2670,2250 2670,2795 2750,2875 2980,2875 3010,2905 3010,2935 3045,2970 v1(3045,2990)
USB_D+: C6.2 R18.1 U1.29 | length 144.6
  Component Side w6: U1.29@3261.02,2372.83 3327.17,2372.83 3340,2360 R18.1@3360.32,2360 C6.2@3360.31,2320
USB_D-: C7.2 R19.1 U1.30 | length 142.4
  Component Side w6: U1.30@3261.02,2392.52 3332.52,2392.52 3340,2400 R19.1@3360.32,2400 C7.2@3360.31,2440
VBAT: BT1.1 D10.A | length 320.9
  Inner Layer 2 w6: v3(2950,1825) 2960.43,1825 v2(3180,2044.57)
VCC: C8.1 C11.1 D8.K D11.2 J1.4 SP2.1 U4.3 | length 4970.8
  Inner Layer 2 w10: v2(2175,2100) 2300,2100 2325,2075 3800,2075 v3(3875,2000)
  Solder Side w8: D8.K@3835.43,2300 SP2.1@3927.95,2300 3927.95,2015.55
  Solder Side w10: C8.1@3809.06,2000 3809.06,2079.54 3788.6,2100 3625,2100 3609,2116 3609,2409 4350,3150 4350,3550 4400,3600 4500,3600 4528.74,3571.26 J1.4@4528.74,3500 ; U4.3@3975,2015.55 4284.45,2015.55 4300,2000 C11.1@4330.31,2000
  Solder Side w30: C8.1@3809.06,2000 3900,2000 3915.55,2015.55 3927.95,2015.55 U4.3@3975,2015.55
XTAL1: C13.2 U1.22 Y1.3 | length 522.5
  Component Side w6: U1.22@3127.17,2238.98 3127.17,2197.83 3175,2150 3480,2150 3493.31,2136.69 Y1.3@3493.31,2092.17 ; C13.2@3330,2104.69 3330,2150
XTAL2: C9.2 U1.23 Y1.1 | length 410.7
  Component Side w6: U1.23@3146.85,2238.98 3146.85,2203.15 3175,2175 3390,2175 3406.69,2191.69 Y1.1@3406.69,2237.83 ; 3330,2175 C9.2@3330,2225.31
pads on no net: C8.0 C16.0 C17.0 C18.0 C22.0 C41.0 C43.0 C45.0 D8.0 D9.0 D10.0 FB3.0 J1.6 J2.9 J3. J3.4 LED2.0 LED3.0 R13.0 R20.0 R34.0 R37.0 R55.0 R56.0 R87.0 S6.0 SD1.1 SD1.8 SD1.14 SD1.15 SP2.0 U1.13 U1.26 U1.32 U1.33 U1.36 U1.47 U1.48 U1.49 U1.59 U1.65 U1.80 U1.81 U1.82 U1.85 U1.100 U5.1

## Polygon pours and split planes (outlines as drawn)
GND on Component Side "Solder Side-No Net" (solid, pour order 13): 2250,1625 4375,1625 4375,1950 2250,1950
GND on Component Side "Solder Side-No Net" (solid, pour order 11): 4675,2675 4075,2675 4075,1975 4675,1975
3V3 on Component Side "Solder Side-No Net" (solid, pour order 10): 3275,3600 3275,3225 4325,3225 4325,3600
GND on Component Side "MCU_GND" (solid, remove dead copper, pour order 9): 2600,2900 2600,2000 3550,2000 3550,2900
GND on Solder Side "Solder Side-No Net" (solid, pour order 14): 1500,2825 1500,2125 2525,2125 2525,2825
GND on Solder Side "Solder Side-No Net" (solid, pour order 12): 4322.44,2450 4322.44,2100 4572.44,2100 4572.44,2450
GND on Solder Side "Solder Side-No Net" (solid, pour order 8): 3275,3600 3275,3225 4325,3225 4325,3600
3V3 on Inner Layer 2 "Top Layer-No Net" (solid, pour order 17): 1500,3700 4700,3700 4700,1600 1500,1600
GND on Inner Layer 1 "Top Layer-No Net" (solid, pour order 19): 1500,3700 4700,3700 4700,1600 1500,1600

## Keep-outs
Keep-Out Layer:
  the board outline again, w10

## Silkscreen, mask and mechanical layers (free items; w line width, h text height)
Top Overlay:
  lines w7.87: 1531.1,3182.68 1531.1,1765.35 4680.71,1765.35 4680.71,3182.68
  lines w10: 1531.1,3182.68 4680.71,3182.68
  text "MDES V2.1 Beta" at 4450,3150 h30 r180
  text "NTUST X EE-305" at 4450,3100 h30 r180

## Text inside footprints (layer, text, board x,y; h text height)
J1: Top Overlay "4" at 4506.1,3611.22 h50 r270; Top Overlay "1" at 4420.47,3600.39 h50 r270; Top Overlay "3" at 4420.47,3268.7 h50 r270; Top Overlay "6" at 4507.09,3269.68 h50 r270
P3: Bottom Overlay "14" at 1608.66,2328.54 h60 r90; Bottom Overlay "13" at 1744.49,2326.57 h60 r90; Bottom Overlay "2" at 1615,2805.2 h60 r90; Bottom Overlay "1" at 1740,2795.2 h60 r90